# Altium PCB BtPS-250.PcbDoc (part 1 of 2)
Units mm, origin at the board's own origin, x right, y up, seen from the top; angles counter-clockwise.
Board outline 165 x 92.4 mm, 2 copper layers (Top Layer, Bottom Layer); 145 components, 82 nets, 422 pads, 41 vias.
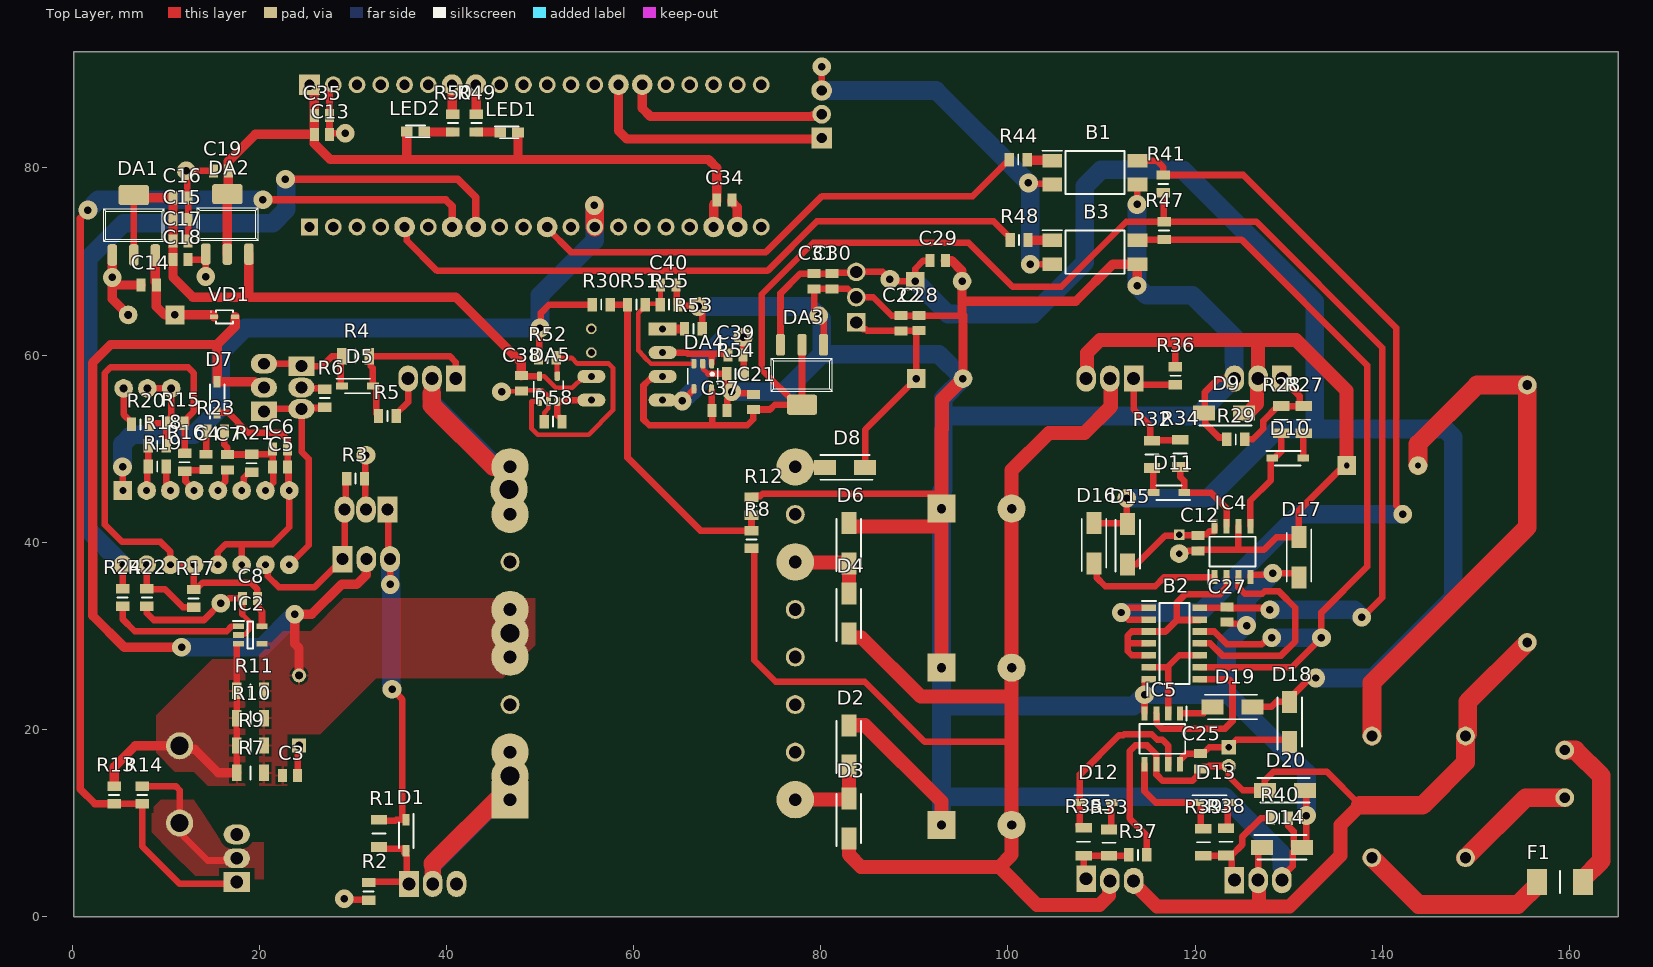
[diagram p0: Top Layer view]
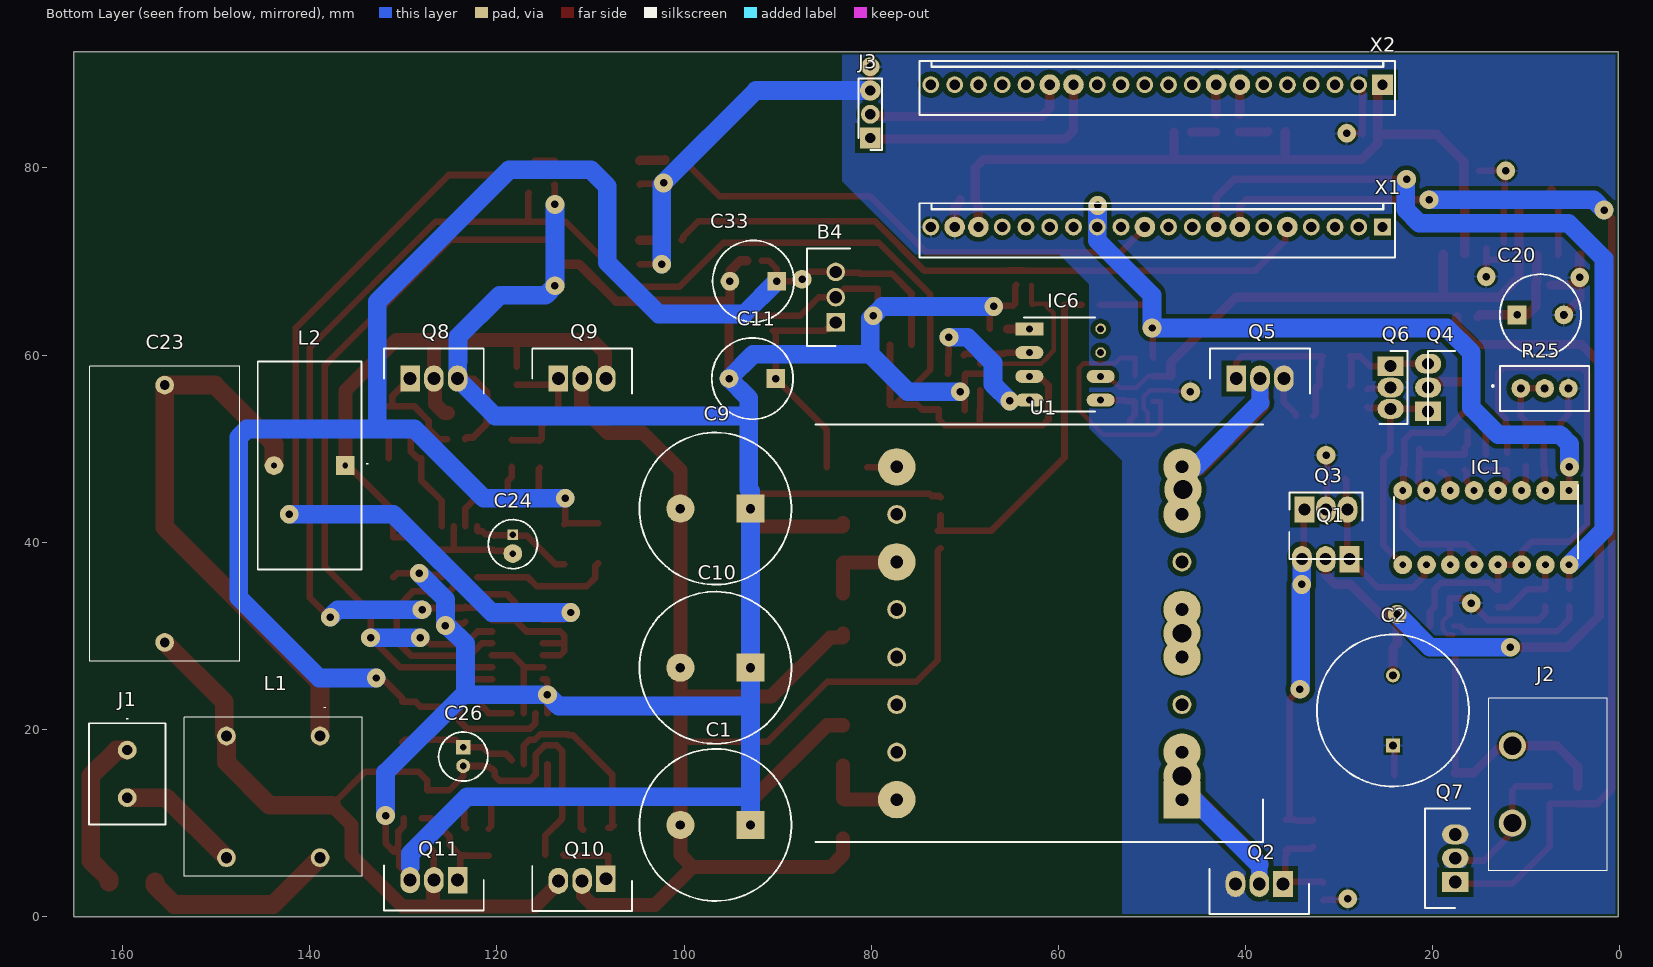
[diagram p1: Bottom Layer view, seen from below]
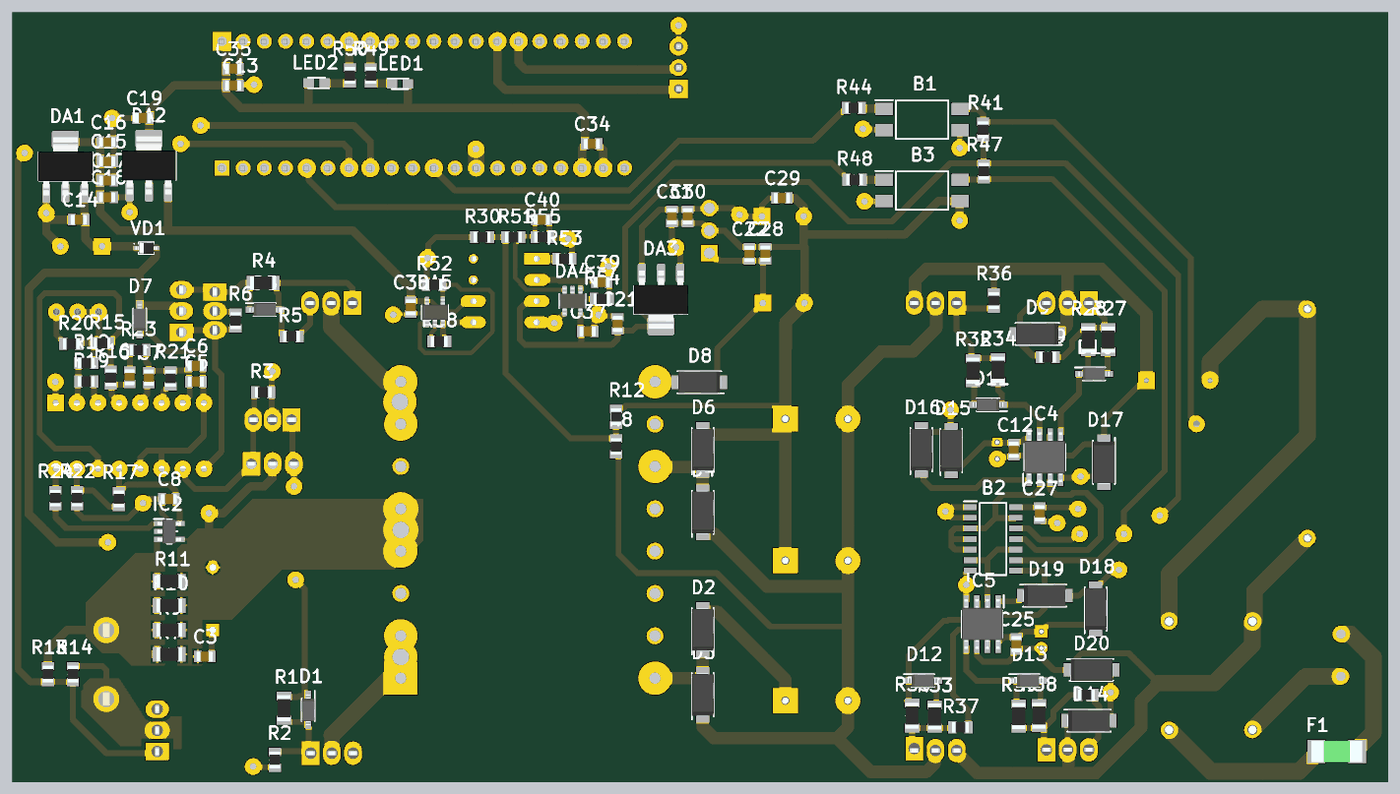
[diagram p2: 3D render of the assembled board from above, using the file's embedded part models]
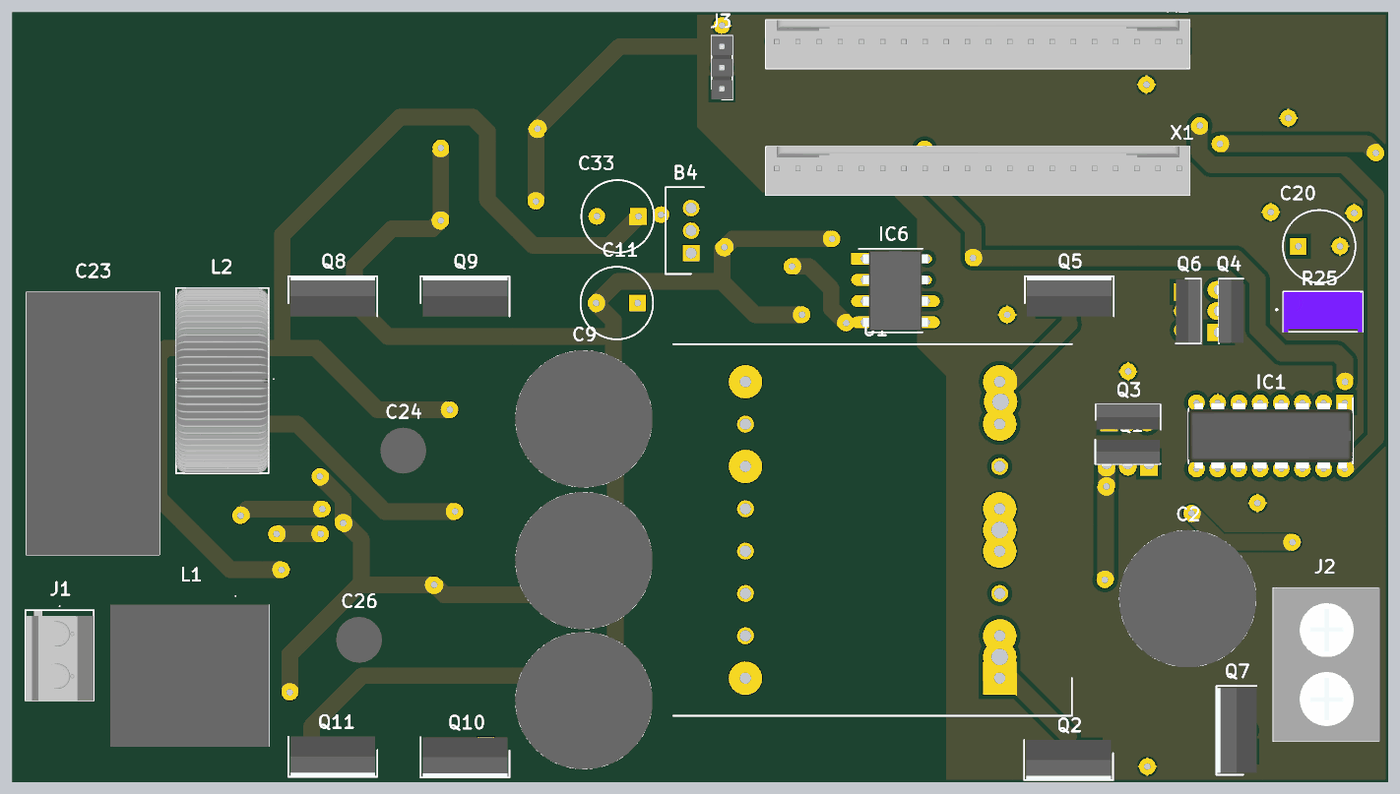
[diagram p3: 3D render of the assembled board from below, using the file's embedded part models]

## Layer stack, top to bottom
Top Solder: solder mask 0.0102, Solder Resist, Dk 3.5
Top Layer: signal copper 0.0356
Dielectric 1: dielectric 0.32, FR-4, Dk 4.8
Bottom Layer: signal copper 0.0356
Bottom Solder: solder mask 0.0102, Solder Resist, Dk 3.5

## Board outline
0.2,0 0.2,92.4 165.2,92.4 165.2,0

## Design rules (kind name [scope] priority, off if disabled: settings)
BoardOutlineClearance [All] p1: gap=0.3 ignorepadtopadclearanceinfootprint=FALSE except(0: Text-OutlineEdge Text-CavityEdge Text-CutoutEdge Text-SplitBarrior Text-SplitContinuation)
Clearance LOW [InNetClass('LOW_Clirance')] p1: gap=0.2 ignorepadtopadclearanceinfootprint=TRUE
Clearance HI_VTG [InNetClass('HI_Voltage')] p2: gap=0.5 ignorepadtopadclearanceinfootprint=TRUE
Clearance [All] p3: gap=0.5 ignorepadtopadclearanceinfootprint=TRUE
Height [All] p1 off: minheight=0 maxheight=25.4 prefheight=12.7
MinimumSolderMaskSliver [All] p1: minsoldermaskwidth=0.15
PolygonConnect [All] p1: connectstyle=Relief reliefconductorwidth=0.254 reliefentries=4 polygonreliefangle="90 Angle" airgapwidth=0.254
RoomDefinition Boost_DC_DC [InComponentClass('Boost_DC_DC')] p1 off: confinementstyle=ConfineIn formatcopy=TRUE lockcomponents=FALSE outline -25.4,-25.4 25.4,-25.4 25.4,0 -25.4,0
RoomDefinition PWM_inverter [InComponentClass('PWM_inverter')] p2 off: confinementstyle=ConfineIn formatcopy=TRUE lockcomponents=FALSE outline -25.4,-25.4 25.4,-25.4 25.4,0 -25.4,0
RoomDefinition Boost_Driver [InComponentClass('Boost_Driver')] p3 off: confinementstyle=ConfineIn formatcopy=TRUE lockcomponents=FALSE outline -25.4,-25.4 25.4,-25.4 25.4,0 -25.4,0
RoomDefinition PWM_Driver [InComponentClass('PWM_Driver')] p4 off: confinementstyle=ConfineIn formatcopy=TRUE lockcomponents=FALSE outline -25.4,-25.4 83.693,-25.4 83.693,38.862 -25.4,38.862
RoomDefinition Power_suply [InComponentClass('Power_suply')] p5 off: confinementstyle=ConfineIn formatcopy=TRUE lockcomponents=FALSE outline -65.913,250.317 18.161,250.317 18.161,311.785 -65.913,311.785
RoomDefinition Mesure [InComponentClass('Mesure')] p6 off: confinementstyle=ConfineIn formatcopy=TRUE lockcomponents=FALSE outline 55.494,281.968 107.564,281.968 107.564,315.623 55.494,315.623
RoomDefinition MCU [InComponentClass('MCU')] p7 off: confinementstyle=ConfineIn formatcopy=TRUE lockcomponents=FALSE outline 98.679,228.661 160.147,228.661 160.147,271.46 98.679,271.46
RoutingVias [All] p1: holewidth=0.8 width=1.6 viastyle="Through Hole" minholewidth=0.6 minwidth=1.5 maxholewidth=1 maxwidth=3
SilkToSilkClearance [All] p1 off: silktosilkclearance=0.254
SilkToSolderMaskClearance [IsPad] p1 off: minsilkscreentomaskgap=0.254 clearancetoexposedcopper=TRUE
SolderMaskExpansion [All] p1: expansion=0.102 istentingtop=FALSE
Width [All] p1: maxlimit=5 minlimit=0.3 preferedwidth=0.5
26 further rules are at their usual default settings.

## Classes and differential pairs
net class HI_Voltage: NetC1_2 NetC23_2 NetF1_1 NetF1_2 NetJ1_2
net class LOW_Clirance: BAT_+ NetC39_1 NetC39_2 NetC40_1 NetDA5_1 NetDA5_3 NetIC2_1 NetIC2_3
component class Boost_DC_DC: C1 C2 C3 C9 C10 C11 D1 D2 D3 D4 D5 D6 D8 J2 Q1 Q2 Q3 Q4 Q5 Q6 Q7 R1 R2 R3 R4 R5 R6 R7 R8 R9 R10 R11 R12 R13 R14 U1
component class MCU: C13 C34 C35 J3 LED1 LED2 R49 R50 X1 X2
component class PWM_Driver: B1 B2 B3 C12 C24 C25 C26 C27 D15 D16 D17 D18 D19 D20 IC4 IC5 R41 R44 R47 R48
component class Mesure: C37 C38 C39 C40 DA4 DA5 IC6 R51 R52 R53 R54 R55 R58
component class PWM_inverter: C23 D9 D10 D11 D12 D13 D14 F1 J1 L1 L2 Q8 Q9 Q10 Q11 R27 R28 R29 R32 R33 R34 R35 R36 R37 R38 R39 R40
component class Power_suply: B4 C14 C15 C16 C17 C18 C19 C20 C21 C22 C28 C29 C30 C31 C33 DA1 DA2 DA3 VD1
component class Boost_Driver: C4 C5 C6 C7 C8 D7 IC1 IC2 R15 R16 R17 R18 R19 R20 R21 R22 R23 R24 R25 R30

## Components (designator, comment, footprint, x,y, rotation, side; value= is the part's Value field where it differs from the comment)
B1 "TLP521-1XSM" SOP254P1016X460-4N 109.3,79.5 r0 top
B2 "74HC00D" SOIC127P600X175-14N 117.8,29.2 r0 top
B3 "TLP521-1XSM" SOP254P1016X460-4N 109.3,71 r0 top
B4 "L7812ACV" TO270P460X1020X2008-3P 83.796,63.49 r90 bottom
C1 "22uF 600V" CAPPRD750W80D1625H2700#1 92.9,9.8 r0 bottom
C2 "470uF 35V" CAPPRD750W80D1625H2700#2 24.257,18.281 r90 bottom
C3 "0,1uF 50V 0805" CAPC2012X90N 23.3,15.1 r180 top
C4 "2.5 uF 50V" CAPC2012X90N 14.3,48.6 r270 top
C5 "10 uF 35V" CAPC2012X90N 22.238,48.073 r0 top
C6 "0,1uF 50V" CAPC2012X90N 22.238,49.978 r0 top
C7 "1n 50V" CAPC2012X90N 16.604,48.554 r270 top
C8 "0,1uF 50V" CAPC2012X90N 19,34 r0 top
C9 "22uF 600V" CAPPRD750W80D1625H2700#1 92.9,43.6 r0 bottom
C10 "22uF 600V" CAPPRD750W80D1625H2700#1 92.9,26.6 r0 bottom
C11 "100uF 50V" CAPPRD500W60D870H1200 90.2,57.5 r0 bottom
C12 "0,1uF 50V 0805" CAPC2012X90N 120.3,39.9 r90 top
C13 "10uF 50V 0805" CAPC2012X90N 26.7,83.6 r0 top
C14 "10uF 50V 0805" CAPC2012X90N 8.2,67.5 r180 top
C15 "10uF 50V 0805" CAPC2012X90N 11.6,74.5 r0 top
C16 "10uF 50V 0805" CAPC2012X90N 11.6,76.8 r0 top
C17 "0,1uF 50V 0805" CAPC2012X90N 11.6,72.2 r0 top
C18 "10uF 50V 0805" CAPC2012X90N 11.6,70.2 r0 top
C19 "10uF 50V 0805" CAPC2012X90N 15.9,79.7 r180 top
C20 "100uF 50V" CAPPRD500W60D870H1200 11,64.3 r180 bottom
C21 "10uF 50V 0805" CAPC2012X90N 72.8,55 r90 top
C22 "10uF 50V 0805" CAPC2012X90N 88.6,63.4 r90 top
C23 "B32674D6335K" B32674D6335K 155.5,29.3 r90 bottom
C24 "UVR1V220MDD1FA" CAPPRD200W50D525H1250#1 118.3,40.8 r270 bottom
C25 "0,1uF 50V 0805" CAPC2012X90N 120.6,16.6 r90 top
C26 "UVR1V220MDD1FA" CAPPRD200W50D525H1250#2 123.6,18.1 r270 bottom
C27 "0,1uF 50V 0805" CAPC2012X90N 123.4,32.3 r270 top
C28 "1uF 50V 0805" CAPC2012X90N 90.504,63.42 r90 top
C29 "10uF 50V 0805" CAPC2012X90N 92.5,70.1 r0 top
C30 "0,1uF 50V 0805" CAPC2012X90N 81.2,67.9 r270 top
C31 "1uF 50V 0805" CAPC2012X90N 79.3,67.9 r270 top
C33 "100uF 50V" CAPPRD500W60D870H1200 90.1,67.9 r0 bottom
C34 "0,1uF 50V 0805" CAPC2012X90N 69.7,76.6 r0 top
C35 "0,1uF 50V 0805" CAPC2012X90N 26.7,85.6 r0 top
C37 "0,1uF 50V 0805" CAPC2012X90N 69.2,54.1 r0 top
C38 "0,1uF 50V 0805" CAPC2012X90N 48,57 r90 top
C39 "100p 0805" CAPC2012X90N 70.9,60 r0 top
C40 "0,1uF 50V 0805" CAPC2012X90N 63.7,67.5 r0 top
D1 "1N4148W-E3-08" SOD3716X135N#1 35.7,8.7 r270 top
D2 "ES1D" DIOM5226X295N 83,18.3 r90 top
D3 "ES1D" DIOM5226X295N 83,10.5 r90 top
D4 "ES1D" DIOM5226X295N 83,32.4 r90 top
D5 "1N4148W-E3-08" SOD3716X135N#1 30.5,56.7 r0 top
D6 "ES1D" DIOM5226X295N 83,39.9 r90 top
D7 "1N4148W-E3-08" SOD3716X135N#1 15.5,55.5 r90 top
D8 "ES1D" DIOM5226X295N 82.6,48 r180 top
D9 "ES1D" DIOM5226X295N 123.1,53.8 r180 top
D10 "1N4148W-E3-08" SOD3716X135N#1 129.9,49 r0 top
D11 "1N4148W-E3-08" SOD3716X135N#1 117.2,45.3 r180 top
D12 "1N4148W-E3-08" SOD3716X135N#2 109.4,12.2 r0 top
D13 "1N4148W-E3-08" SOD3716X135N#1 122,12.2 r0 top
D14 "ES1D" DIOM5226X295N 129.3,7.4 r0 top
D15 "ES1D" DIOM5226X295N 112.8,39.8 r90 top
D16 "ES1D" DIOM5226X295N 109.2,39.9 r90 top
D17 "ES1D" DIOM5226X295N 131.1,38.4 r270 top
D18 "ES1D" DIOM5226X295N 130.1,20.8 r90 top
D19 "ES1D" DIOM5226X295N 124,22.4 r0 top
D20 "ES1D" DIOM5226X295N 129.6,13.5 r0 top
DA1 "" SOT-223 6.6,73.9 r0 top
DA2 "" SOT-223 16.6,74 r0 top
DA3 "" SOT-223 78,57.9 r180 top
DA4 "TLV9061IDBVR" SOT-23-5 67.39,57.74 r180 top
DA5 "TLV9061IDBVR" SOT-23-5 50.9,56.4 r0 top
F1 "0679H2000-05" FUSC6125X279N 159,3.7 r0 top
IC1 "TL494CN" DIP794W53P254L1930H508Q16N 14.318,41.569 r270 bottom
IC2 "INA180A2IDBVR" SOT95P280X145-5N 19.05,30.099 r0 top
IC4 "IR2102SPBF" SOIC127P600X175-8N#1 124,39 r90 top
IC5 "IR2102SPBF" SOIC127P600X175-8N#2 116.5,19 r270 top
IC6 "LOC110" DIP762W53P254L965H335Q8N 59.3,59 r180 bottom
J1 "0398800302" 0398800302 159.5,17.8 r270 bottom
J2 "0387006302" 0387006302 11.5,10 r90 bottom
J3 "961103-6404-AR" HDRV3W64P0X254_1X3_762X250X1050P 80.1,83.2 r90 bottom
L1 "BU10-6003R0BL" BU106003R0BL 138.9,19.3 r270 bottom
L2 "5704-RC" 5704RC 136.2,48.2 r0 bottom
LED1 "LTST-C171KRKT" LEDM2012X90N 46.7,83.8 r0 top
LED2 "LTST-C171KRKT" LEDM2012X90N 36.7,83.9 r180 top
Q1 "BD139" TO254P290X760X1320-3P 28.9,38.2 r0 bottom
Q2 "IRF2804PBF" TO254P482X1016X2192-3P#1 36,3.5 r0 bottom
Q3 "BD140" TO229P300X760X1364-3P 33.7,43.5 r180 bottom
Q4 "BD139" TO254P290X760X1320-3P 20.5,54 r90 bottom
Q5 "IRF2804PBF" TO254P482X1016X2192-3P#1 41,57.5 r180 bottom
Q6 "BD140" TO229P300X760X1364-3P 24.508,58.83 r270 bottom
Q7 "IRF2804PBF" TO254P482X1016X2192-3P#1 17.6,3.7 r90 bottom
Q8 "IRF2804PBF" TO254P482X1016X2192-3P#1 129.28,57.5 r180 bottom
Q9 "IRF2804PBF" TO254P482X1016X2192-3P#1 113.44,57.5 r180 bottom
Q10 "IRF2804PBF" TO254P482X1016X2192-3P#2 108.36,3.823 r0 bottom
Q11 "IRF2804PBF" TO254P482X1016X2192-3P#1 124.2,3.9 r0 bottom
R1 "10-1206" RESC3116X75N#1 32.8,8.9 r270 top
R2 "100k" RESC2013X65N#1 31.7,2.7 r90 top
R3 "4,7k" RESC2013X65N#1 30.3,46.8 r180 top
R4 "10-1206" RESC3116X75N#1 30.3,59.9 r0 top
R5 "100k" RESC2013X65N#1 33.7,53.5 r180 top
R6 "4,7k" RESC2013X65N#1 27,55.4 r270 top
R7 "0.002" RESC3116X75N#1 19.05,15.367 r0 top
R8 "36k" RESC2013X65N#1 72.6,40.3 r270 top
R9 "0.002" RESC3116X75N#1 19.05,18.288 r0 top
R10 "0.002" RESC3116X75N#1 19.05,21.209 r0 top
R11 "0.002" RESC3116X75N#1 19.05,24.13 r0 top
R12 "1k" RESC2013X65N#1 72.6,43.85 r270 top
R13 "18k" RESC2013X65N#1 4.5,13 r90 top
R14 "2k" RESC2013X65N#1 7.5,13 r270 top
R15 "10k" RESC2013X65N#1 11,52.7 r0 top
R16 "9.1k" RESC2013X65N#1 12.032,48.554 r90 top
R17 "10k" RESC2013X65N#1 13,34 r90 top
R18 "510" RESC2013X65N#1 9.1,50.3 r0 top
R19 "100k" RESC2013X65N#1 9.1,48.1 r0 top
R20 "2,2k" RESC2013X65N#1 7.3,52.6 r0 top
R21 "12k" RESC2013X65N#1 19.19,48.454 r270 top
R22 "2.2k" RESC2013X65N#1 8,34.1 r90 top
R23 "1k" RESC2013X65N#1 15.334,51.856 r180 top
R24 "12k" RESC2013X65N#1 5.4,34.1 r270 top
R25 "3296W-1-101LF" 3296W-1 8.05,56.442 r180 bottom
R27 "4.7-1206" RESC3116X75N#1 131.6,53.1 r90 top
R28 "20-1206" RESC3116X75N#1 129.2,53.1 r90 top
R29 "100k" RESC2013X65N#1 124.351,51.001 r0 top
R30 "100k" RESC2013X65N#1 56.553,65.4 r180 top
R32 "4.7-1206" RESC3116X75N#1 115.4,49.4 r90 top
R33 "4.7-1206" RESC3116X75N#2 110.8,7.9 r270 top
R34 "20-1206" RESC3116X75N#1 118.4,49.5 r90 top
R35 "20-1206" RESC3116X75N#3 108.1,8 r270 top
R36 "100k" RESC2013X65N#1 117.9,57.8 r270 top
R37 "100k" RESC2013X65N#2 113.9,6.6 r180 top
R38 "4.7-1206" RESC3116X75N#1 123.3,8 r270 top
R39 "20-1206" RESC3116X75N#1 120.875,7.95 r270 top
R40 "100k" RESC2013X65N#1 129,10.5 r180 top
R41 "1k" RESC2013X65N#1 116.6,78.3 r90 top
R44 "330" RESC2013X65N#1 101.1,80.9 r0 top
R47 "1k" RESC2013X65N#1 116.7,73.3 r270 top
R48 "330" RESC2013X65N#1 101.2,72.3 r0 top
R49 "1k" RESC2013X65N#1 43.2,84.8 r90 top
R50 "1k" RESC2013X65N#1 40.7,84.8 r90 top
R51 "0" RESC2013X65N#1 60.3,65.4 r0 top
R52 "10k" RESC2013X65N#1 50.8,59.7 r180 top
R53 "200" RESC2013X65N#1 66.4,62.8 r180 top
R54 "10k" RESC2013X65N#1 70.9,58 r0 top
R55 "200k" RESC2013X65N#1 63.8,65.4 r180 top
R58 "10k" RESC2013X65N#1 51.4,52.9 r0 top
U1 "CPH-ETD39-1S-16P-C" DIPS3048W80P508L4460H3610Q16N 46.8,12.5 r0 bottom locked
VD1 "BAS316" SOD-323_MED 16.3,64.1 r0 top
X1 "WH-20S" WF-20S#1 49.5,73.695 r0 bottom locked
X2 "WH-20S" WF-20S#2 49.5,88.9 r0 bottom locked

## Footprints (in the part's own frame and the unit in brackets; to place one, negate y for a bottom-side part, rotate by r counter-clockwise, add the part's x,y. Pads: shape width x height; smd on the part's side, far side on the other; paste and mask are expansions set on the pad)
3296W-1 [mm]
  round 2 hole 0.8: 1(-2.54,0) 2(0,0) 3(2.54,0)
  silkscreen extent -5.64,-2.41 4.76,2.41, body extent -4.78,-2.48 4.78,2.35, height 11.55
5704RC [mm]
  rect 2x2 hole 0.606: 1(0,0)
  round 2 hole 0.606: 2(7.62,0)
  silkscreen extent -2.4,-11.11 9.36,11.11, body extent -1.74,-11.11 9.36,11.11, height 22.01
0387006302 [mm]
  round 2.895 hole 1.93: 1(0,0) 2(8.26,0)
  silkscreen extent -5.07,-10.16 13.33,2.54, body extent -5.1,-10.25 13.36,2.45, height 12.7
0398800302 [mm]
  round 2 hole 1.1: 1(0,0) 2(5.08,0)
  silkscreen extent -3.4,-4.1 7.95,4.1, body extent -2.78,-4.08 7.99,4.05, height 10.1
B32674D6335K [mm]
  round 2 hole 1.05: 1(0,0) 2(27.5,0)
  silkscreen extent -2,-8 29.5,8, body extent -2,-8 29.5,8, height 32.1
BU106003R0BL [mm]
  round 2 hole 1.2: 1(0,0) 2(0,-10) 3(13,-10) 4(13,0)
  silkscreen extent -3.1,-14.5 15,4.5, body extent -2,-14.5 15,4.5, height 22.6
CAPC2012X90N [mm]
  rect 0.96x1.39 smd: 1(-0.81,0) 2(0.81,0)
  body extent -1,-0.63 1,0.63, height 0.9
CAPPRD200W50D525H1250#1 [mm]
  rect 1.1x1.1 hole 0.7: 1(0,0)
  round 2 hole 0.7: 2(2,0)
  silkscreen extent -1.62,-2.63 3.62,2.62, body extent -1.75,-2.75 3.75,2.75, height 12.5
CAPPRD200W50D525H1250#2 [mm]
  rect 1.5x1.5 hole 0.7: 1(0,0)
  round 1.5 hole 0.7: 2(2,0)
  silkscreen extent -1.62,-2.63 3.62,2.62, body extent -1.74,-2.75 3.75,2.75, height 12.5
CAPPRD500W60D870H1200 [mm]
  rect 2x2 / inner round 1.2 / far side rect 2x2 hole 0.8: 1(0,0)
  round 2 hole 0.8: 2(5,0)
  silkscreen extent -1.85,-4.35 6.85,4.35
CAPPRD750W80D1625H2700#1 [mm]
  rect 3x3 hole 1: 1(0,0)
  round 3 hole 1: 2(7.5,0)
  silkscreen extent -4.37,-8.12 11.88,8.12, body extent -4.5,-8.25 12,8.25, height 27
CAPPRD750W80D1625H2700#2 [mm]
  rect 1.5x1.5 hole 0.8: 1(0,0)
  round 1.5 hole 0.8: 2(7.5,0)
  silkscreen extent -4.37,-8.12 11.87,8.13, body extent -4.5,-8.25 12,8.25, height 27
DIOM5226X295N [mm]
  rect 2.35x1.6 smd: 1(-2.15,0) 2(2.15,0)
  silkscreen extent -2.95,-1.31 2.62,1.31, body extent -2.62,-1.31 2.62,1.31, height 2.95
DIP762W53P254L965H335Q8N [mm]
  rect 3x1.4 hole 0.733: 1(-3.81,3.81)
  oval 3x1.4 hole 0.733: 2(-3.81,1.27) 3(-3.81,-1.27) 4(-3.81,-3.81) 5(3.81,-3.81) 6(3.81,-1.27)
  round 1.133 hole 0.733: 7(3.81,1.27) 8(3.81,3.81)
  silkscreen extent -4.38,-5.02 3.24,5.02, body extent -3.94,-4.83 3.94,4.83, height 3.35
DIP794W53P254L1930H508Q16N [mm]
  rect 2x2 hole 0.73: 1(-3.97,8.89)
  round 2 hole 0.73: 2(-3.97,6.35) 3(-3.97,3.81) 4(-3.97,1.27) 5(-3.97,-1.27) 6(-3.97,-3.81) 7(-3.97,-6.35) 8(-3.97,-8.89) 9(3.97,-8.89) 10(3.97,-6.35) 11(3.97,-3.81) 12(3.97,-1.27) 13(3.97,1.27) 14(3.97,3.81) 15(3.97,6.35) 16(3.97,8.89)
  silkscreen extent -4.53,-9.84 3.3,9.84, body extent -3.94,-9.84 3.94,9.84, height 5.27
DIPS3048W80P508L4460H3610Q16N [mm]
  rect 4x4 hole 1.35: 1(0,0)
  round 4 hole 1.35: 2(0,-5.08) 4(0,-15.24) 5(0,-20.32) 7(0,-30.48) 8(0,-35.56) 9(30.48,-35.56) 11(30.48,-25.4) 16(30.48,0)
  round 2.025 hole 1.35: 3(0,-10.16) 6(0,-25.4) 10(30.48,-30.48) 12(30.48,-20.32) 13(30.48,-15.24) 14(30.48,-10.16) 15(30.48,-5.08)
  silkscreen extent -8.66,-40.08 39.14,4.52
FUSC6125X279N [mm]
  rect 2.15x2.8 smd: 1(-2.455,0) 2(2.455,0)
  silkscreen extent 0,-1.17 0,1.17, body extent -3.05,-1.27 3.05,1.27, height 2.79
HDRV3W64P0X254_1X3_762X250X1050P [mm]
  rect 2.2x2.2 hole 1.1: 1(0,0)
  round 2 hole 1.1: 2(2.54,0)
  round 2.2 hole 1.1: 3(5.08,0)
  silkscreen extent -1.27,-1.25 6.35,1.25, body extent -1.27,-1.25 6.35,1.25, height 10.5
LEDM2012X90N [mm]
  rect 1.25x1.1 smd: 1(-0.95,0) 2(0.95,0)
  silkscreen extent -1.5,-0.63 1,0.63
RESC2013X65N#1 [mm]
  rect 1x1.45 smd: 1(-0.95,0) 2(0.95,0)
  silkscreen extent 0,-0.54 0,0.54, body extent -1,-0.64 1,0.64, height 0.65
RESC2013X65N#2 [mm]
  rect 1x1.45 smd: 1(-0.95,0) 2(1,0)
  silkscreen extent 0,-0.54 0,0.54, body extent -1,-0.64 1,0.64, height 0.65
RESC3116X75N#1 [mm]
  rect 1.05x1.75 smd: 1(-1.45,0) 2(1.45,0)
  silkscreen extent 0,-0.7 0,0.7, body extent -1.55,-0.8 1.55,0.8, height 0.75
RESC3116X75N#2 [mm]
  rect 1.05x1.75 smd: 1(-1.4,0) 2(1.4,0)
  silkscreen extent 0,-0.7 0,0.7, body extent -1.55,-0.8 1.55,0.8, height 0.75
RESC3116X75N#3 [mm]
  rect 1.05x1.75 smd: 1(-1.5,0) 2(1.5,0)
  silkscreen extent 0,-0.7 0,0.7, body extent -1.55,-0.8 1.55,0.8, height 0.75
SOD3716X135N#1 [mm]
  rect 1.25x0.75 smd: 1(-1.65,0) 2(1.65,0)
  silkscreen extent -2.27,-0.77 1.35,0.77, body extent -1.85,-0.77 1.85,0.77, height 1.35
SOD3716X135N#2 [mm]
  rect 1.25x0.75 smd: 1(-1.7,0) 2(1.7,0)
  silkscreen extent -2.27,-0.77 1.35,0.77, body extent -1.85,-0.77 1.85,0.77, height 1.35
SOD-323_MED [mm] "SOD-323, 2-Leads, Body 1,25x2,50mm, IPC Medium Density"
  rrect15% 0.85x0.45 smd paste+0 mask+0.05: AN(1.125,0) CA(-1.125,0)
  silkscreen extent -1.5,-0.7 0.9,0.7, body extent -1.3,-0.67 1.3,0.68, height 1.1
SOIC127P600X175-8N#1 [mm]
  rect 1.525x0.65 smd: 1(-2.712,1.905) 2(-2.712,0.635) 3(-2.712,-0.635) 4(-2.712,-1.905) 5(2.712,-1.905) 6(2.712,-0.635) 7(2.712,0.635) 8(2.712,1.905)
  silkscreen extent -3.47,-2.45 1.6,2.58, body extent -3,-2.45 3,2.45, height 1.75
SOIC127P600X175-8N#2 [mm]
  rect 1.525x0.65 smd: 1(-2.712,1.905) 2(-2.712,0.635) 3(-2.712,-0.635) 4(-2.712,-1.905) 5(2.712,-1.905) 6(2.712,-0.635) 7(2.706,0.632) 8(2.712,1.905)
  silkscreen extent -3.47,-2.45 1.6,2.58, body extent -3,-2.45 3,2.45, height 1.75
SOIC127P600X175-14N [mm]
  rect 1.55x0.7 smd: 1(-2.725,3.81) 2(-2.725,2.54) 3(-2.725,1.27) 4(-2.725,0) 5(-2.725,-1.27) 6(-2.725,-2.54) 7(-2.725,-3.81) 8(2.725,-3.81) 9(2.725,-2.54) 10(2.725,-1.27) 11(2.725,0) 12(2.725,1.27) 13(2.725,2.54) 14(2.725,3.81)
  silkscreen extent -3.5,-4.33 1.6,4.51
SOP254P1016X460-4N [mm]
  rect 2.1x1.45 smd: 1(-4.55,1.27) 2(-4.55,-1.27) 3(4.55,-1.27) 4(4.55,1.27)
  silkscreen extent -5.6,-2.3 3.15,2.34
SOT95P280X145-5N [mm]
  rect 1.2x0.6 smd mask+0.05: 1(-1.25,0.95) 2(-1.25,0) 3(-1.25,-0.95) 4(1.25,-0.95) 5(1.25,0.95)
  silkscreen extent -1.85,-1.45 0.3,1.5, body extent -1.4,-1.45 1.4,1.45, height 1.2
SOT-23-5 [mm] "SOT23, 5-Leads, Body 2,80x1,60mm, Pitch 0,95mm, IPC Medium Density"
  rrect50% 0.55x1 smd mask+0.05: 1(-0.95,-1.35) 2(0,-1.35) 3(0.95,-1.35) 4(0.95,1.35) 5(-0.95,1.35)
  silkscreen extent -1.59,-0.88 1.59,0.85, body extent -1.55,-1.6 1.55,1.6, height 1.45
SOT-223 [mm]
  rrect50% 1x2.3 smd mask+0.05: 1(-2.3,-3.2) 2(0,-3.2) 3(2.3,-3.2)
  rrect25% 3.25x2.15 smd mask+0.05: 4(0,3.2)
  silkscreen extent -3.22,-1.75 3.28,1.75, body extent -3.25,-3.48 3.25,3.48, height 1.68
TO229P300X760X1364-3P [mm]
  rect 2.1x2.8 hole 1.3 mask+0.05: 1(0,0)
  oval 2.1x2.8 hole 1.3 mask+0.05: 2(2.29,0) 3(4.58,0)
  silkscreen extent -1.61,-1.17 6.19,1.83, body extent -1.51,-1.17 6.09,1.83, height 12.76
TO254P290X760X1320-3P [mm]
  rect 2.1x2.8 hole 1.28: 1(0,0)
  oval 2.1x2.8 hole 1.28: 2(2.54,0) 3(5.08,0)
  silkscreen extent -1.36,-2.9 6.44,0, body extent -1.26,-2.9 6.34,0.25, height 12.92
TO254P482X1016X2192-3P#1 [mm]
  rect 2.1x2.8 hole 1.38: 1(0,0)
  oval 2.1x2.8 hole 1.38: 2(2.54,0) 3(5.08,0)
  silkscreen extent -2.79,-1.6 7.87,3.22, body extent -2.54,-1.59 7.62,3.22, height 21.25
TO254P482X1016X2192-3P#2 [mm]
  rect 2.1x2.8 hole 1.38: 1(0,-0.223)
  oval 2.1x2.8 hole 1.38: 2(2.54,0) 3(5.08,0)
  silkscreen extent -2.79,-1.6 7.87,3.22, body extent -2.54,-1.6 7.62,3.23, height 21.25
TO270P460X1020X2008-3P [mm]
  rect 1.98x1.98 / inner round 1.98 / far side rect 1.98x1.98 hole 1.32: 1(0,0)
  round 1.98 hole 1.32: 2(2.7,0) 3(5.4,0)
  silkscreen extent -2.5,-1.53 7.9,3.07
WF-20S#1 [mm] "Connector; Header; 20 Position"
  rect 1.8x1.8 hole 1.1: 1(-24.13,0)
  round 1.8 hole 1.1: 2(-21.59,0) 3(-19.05,0) 4(-16.51,0) 6(-11.43,0) 9(-3.81,0) 10(-1.27,0) 12(3.81,0) 13(6.35,0) 14(8.89,0) 15(11.43,0) 16(13.97,0) 17(16.51,0) 20(24.13,0)
  round 2.2 hole 1.1: 5(-13.97,0) 7(-8.89,0) 8(-6.35,0) 11(1.27,0) 18(19.05,0) 19(21.59,0)
  silkscreen extent -25.47,-2.54 25.33,3.25, body extent -25.5,-2.55 25.3,3.25, height 11.63
WF-20S#2 [mm] "Connector; Header; 20 Position"
  rect 2.2x2.2 hole 1.1: 1(-24.13,0)
  round 1.8 hole 1.1: 2(-21.59,0) 3(-19.05,0) 4(-16.51,0) 5(-13.97,0) 6(-11.43,0) 9(-3.81,0) 10(-1.27,0) 11(1.27,0) 12(3.81,0) 13(6.35,0) 16(13.97,0) 17(16.51,0) 18(19.05,0) 19(21.59,0) 20(24.13,0)
  round 2.2 hole 1.1: 7(-8.89,0) 8(-6.35,0) 14(8.89,0) 15(11.43,0)
  silkscreen extent -25.47,-2.54 25.33,3.25, body extent -25.5,-2.55 25.3,3.25, height 11.63

## Part data
B1 B3: "Optocoupler; SMD; Channels:1; Out: transistor; Uinsul:5.3kV", Manufacturer_Name=Isocom, Datasheet Link=https://datasheet.lcsc.com/szlcsc/Isocom-Components-TLP521-1XSM_C83157.pdf, Geometry.Height=4.6mm, Manufacturer_Part_Number=TLP521-1XSM
B2: "NEXPERIA - 74HC00D - NAND Gate, 74HC00, 2 Input, 5.2 mA, 2 V to 6 V, SOIC-14", Manufacturer_Name=Nexperia, Mouser Part Number=771-74HC00D, Datasheet Link=https://altium.componentsearchengine.com/Datasheets/2/74HC00D.pdf, Geometry.Height=1.75mm, Manufacturer_Part_Number=74HC00D, Mouser Price/Stock=https://www.mouser.co.uk/ProductDetail/Nexperia/74HC00D?qs=Q7xBXtx7xQgKEyQZmXe6mg%3D%3D
B4: "TO220 voltage regulator,L7812ACV 12V 1A STMicroelectronics L7812ACV, Single Linear Voltage Regulator, 1A 12 V, 2%, 3-Pin TO-220", Manufacturer_Name=STMicroelectronics, Mouser Part Number=511-L7812ACV, Arrow Part Number=L7812ACV, Arrow Price/Stock=https://www.arrow.com/en/products/l7812acv/stmicroelectronics?region=europe, Datasheet Link=http://www.st.com/web/en/resource/technical/document/datasheet/CD00000444.pdf, Geometry.Height=4.6mm, Manufacturer_Part_Number=L7812ACV, Mouser Price/Stock=https://www.mouser.co.uk/ProductDetail/STMicroelectronics/L7812ACV?qs=bZskSr8d5Y9fWhq%2FyUrU3A%3D%3D
C1 C2 C9 C10: library part UPW1H102MHD, "Capacitor", Height=27mm
C3 C4 C5 C6 C7 C8 C12 C13 C14 C15 C16 C17 C18 C19 C21 C22 C25 C27 C28 C29 C30 C31 C34 C35 C37 C38 C39 C40: library part MCMT21N470F250CT, "Capacitor", Height=0.9mm
C11 C20 C33: library part MAL203690109E3, "Aluminum Electrolytic Capacitors - Radial Leaded 100uF 50V 20% Radial", Manufacturer_Name=Vishay, Mouser Part Number=594-2222-036-90109, Arrow Part Number=MAL203690109E3, Arrow Price/Stock=https://www.arrow.com/en/products/mal203690109e3/vishay, Datasheet Link=https://www.vishay.com/docs/28312/036rsp.pdf, Geometry.Height=12mm, Manufacturer_Part_Number=MAL203690109E3, Mouser Price/Stock=https://www.mouser.co.uk/ProductDetail/Vishay-BC-Components/MAL203690109E3?qs=4T%252B5yYZyZYdFWMOgqUZuiA%3D%3D
C23: "Capacitor", Manufacturer_Name=TDK, Mouser Part Number=871-B32674D6335K, Arrow Part Number=B32674D6335K, Arrow Price/Stock=https://www.arrow.com/en/products/b32674d6335k/epcos-tdk, Datasheet Link=https://en.tdk.eu/inf/20/20/db/fc_2009/MKP_B32674_678.pdf, Height=32mm, Manufacturer_Part_Number=B32674D6335K, Mouser Price/Stock=https://www.mouser.co.uk/ProductDetail/EPCOS-TDK/B32674D6335K?qs=IQR8xM2KsGjr5uKRT4Ngjw%3D%3D
C24 C26: "Capacitor Polarised", Manufacturer_Name=Nichicon, Mouser Part Number=647-UVR1V220MDD1FA, Datasheet Link=https://componentsearchengine.com/Datasheets/1/UVR1V220MDD1FA.pdf, Height=12.5mm, Manufacturer_Part_Number=UVR1V220MDD1FA, Mouser Price/Stock=https://www.mouser.co.uk/ProductDetail/Nichicon/UVR1V220MDD1FA/?qs=aEaV1LakhLZp9mEQuSYOqQ%3D%3D
D1 D5 D7 D10 D11 D12 D13: "Diode", Manufacturer_Name=Vishay, Mouser Part Number=78-1N4148W-E3-08, Arrow Part Number=1N4148W-E3-08, Arrow Price/Stock=https://www.arrow.com/en/products/1n4148w-e3-08/vishay?region=nac, Datasheet Link=http://www.vishay.com/docs/85748/1n4148w.pdf, Height=1.35mm, Manufacturer_Part_Number=1N4148W-E3-08, Mouser Price/Stock=https://www.mouser.co.uk/ProductDetail/Vishay-Semiconductors/1N4148W-E3-08?qs=bTzheeSci6TVjpxfjjRVMw%3D%3D
D2 D3 D4 D6 D8 D9 D14 D15 D16 D17 D18 D19 D20: "Diode", Manufacturer_Name=SMC, Datasheet Link=https://4donline.ihs.com/images/VipMasterIC/IC/SMCD/SMCD-S-A0005425901/SMCD-S-A0005425901-1.pdf?hkey=833C7E3902CC3CD9C0453977398360A8, Height=2.95mm, Manufacturer_Part_Number=ES1D
DA1 DA3: library part LM1117MP-3.3, "Linear Voltage Regulator IC 1 Output 800mA SOT-223", Package=SOT-223, Part Number=LM1117S-5.0, Component Type=SMD, ComponentLink1Description=Datasheet, ComponentLink1URL=https://www.ti.com/lit/ds/symlink/lm1117.pdf
DA2: library part LM1117MP-3.3, "Linear Voltage Regulator IC 1 Output 800mA SOT-223", Manufacturer="Texas Instruments", Package=SOT-223, Supplier Part Number 1=LM1117MP-3.3/NOPBTR-ND, Temperature range="0°C ~ 125°C", Ajax_1C_ID=9463, Ajax_1C_PN="LM1117MP-3.3 Molded SOT-223, 6.50 x 3.56 x 1.6mm Body, 4 Lead, 2.3mm Pitch MP04A_N	1SPX", Component Status="On Review", Component Type=SMD, ComponentLink1Description=Datasheet, ComponentLink1URL=https://www.ti.com/lit/ds/symlink/lm1117.pdf, GUID_1C=e0b887c0-e6df-11e6-82a6-d8cb8a9acc66, Lifecycle="RND Only", Part Number=LM1117MP-3.3, Part Type="Power / Linear Regulator", Replacement=NONE, Standard Lead Time="6 Weeks", Supplier 1=Digi-Key
DA4 DA5: "10MHz, 0.5pA Bias, Rail-to-Rail Input/Output, 1.8V CMOS Operational Amplifiers, 1 Channels, SOT-23-5", Manufacturer="Texas Instruments", Package=SOT-23-5, Supplier Part Number 1=296-52284-2-ND, Temperature range="-40°C ~ 125°C", Ajax_1C_ID=24284, Ajax_1C_PN="TLV9061IDBVR TI 1.8V-5.5V Operational Amplifier IC SOT23-5", Ajax_1С_Status="Mass Production", Component Type=SMD, ComponentLink1Description=Datasheet, ComponentLink1URL=https://www.ti.com/lit/ds/symlink/tlv9061.pdf, Part Number=TLV9061IDBVR, Part Type="Amplifier / OpAmp", Price=0,72409091, Replacement=NONE, Standard Lead Time="16 Weeks", Supplier 1=Digi-Key
F1: "Fuse", Manufacturer_Name="Bel Circuit Protection", Arrow Part Number=0679H2000-05, Arrow Price/Stock=https://www.arrow.com/en/products/0679h2000-05/bel-group?region=nac, Datasheet Link=https://www.arrow.com/en/products/0679h2000-05/bel-group, Height=2.79mm, Manufacturer_Part_Number=0679H2000-05
IC1: "Integrated Circuit", Manufacturer_Name="Texas Instruments", Mouser Part Number=595-TL494CN, Arrow Part Number=TL494CN, Arrow Price/Stock=https://www.arrow.com/en/products/tl494cn/texas-instruments?region=nac, Datasheet Link=http://www.ti.com/lit/gpn/tl494, Height=5.08mm, Manufacturer_Part_Number=TL494CN, Mouser Price/Stock=https://www.mouser.co.uk/ProductDetail/Texas-Instruments/TL494CN?qs=N6WZOzgtpqWAYQVxthNGyw%3D%3D
IC2: "Integrated Circuit", Manufacturer_Name="Texas Instruments", Mouser Part Number=595-INA180A2IDBVR, Arrow Part Number=INA180A2IDBVR, Arrow Price/Stock=https://www.arrow.com/en/products/ina180a2idbvr/texas-instruments?region=nac, Datasheet Link=http://www.ti.com/lit/ds/symlink/ina180.pdf, Height=1.45mm, Manufacturer_Part_Number=INA180A2IDBVR, Mouser Price/Stock=https://www.mouser.co.uk/ProductDetail/Texas-Instruments/INA180A2IDBVR?qs=5aG0NVq1C4wYcJfa99BoHg%3D%3D
IC4 IC5: "Integrated Circuit", Manufacturer_Name=Infineon, Mouser Part Number=942-IR2102SPBF, Arrow Part Number=IR2102SPBF, Arrow Price/Stock=https://www.arrow.com/en/products/ir2102spbf/infineon-technologies-ag?region=nac, Datasheet Link=https://www.infineon.com/cms/en/product/power/gate-driver-ics/?, Height=1.75mm, Manufacturer_Part_Number=IR2102SPBF, Mouser Price/Stock=https://www.mouser.co.uk/ProductDetail/Infineon-IR/IR2102SPBF?qs=dQmlx5f5cRJqfCRMLAcrGg%3D%3D
IC6: "Integrated Circuit", Manufacturer_Name=LITTELFUSE, Mouser Part Number=849-LOC110, Arrow Part Number=LOC110, Arrow Price/Stock=https://www.arrow.com/en/products/loc110/ixys, Datasheet Link=http://www.ixysic.com/home/pdfs.nsf/0/2E7C7ED81A9497A385256A2C0068BE89/$file/LOC110.pdf, Height=3.353mm, Manufacturer_Part_Number=LOC110, Mouser Price/Stock=https://www.mouser.co.uk/ProductDetail/IXYS-Integrated-Circuits/LOC110?qs=lQlU%252BwB40guWe%2FeQ%2FzktPA%3D%3D
J1 J2: "Connector", Manufacturer_Name=Molex, Mouser Part Number=N/A
  J1: Arrow Part Number=0398800302, Arrow Price/Stock=https://www.arrow.com/en/products/0398800302/molex?region=nac, Datasheet Link=https://www.molex.com/pdm_docs/sd/398800302_sd.pdf, Height=10.3mm, Manufacturer_Part_Number=0398800302, Mouser Price/Stock=https://www.mouser.co.uk/ProductDetail/Molex/0398800302?qs=PBcRNPEHKsqSgs7Dx0mONg%3D%3D
  J2: Arrow Part Number=0387006302, Arrow Price/Stock=https://www.arrow.com/en/products/0387006302/molex, Datasheet Link=https://datasheet.datasheetarchive.com/originals/distributors/Datasheets-DGA23/1543392.pdf, Height=13mm, Manufacturer_Part_Number=0387006302, Mouser Price/Stock=https://www.mouser.co.uk/ProductDetail/Molex/0387006302/?qs=PBcRNPEHKsoO9p6NPCT14g%3D%3D
J3: "Connector", Manufacturer_Name=3M, Mouser Part Number=517-9611036404AR, Datasheet Link=https://datasheet.datasheetarchive.com/originals/distributors/Datasheets-DGA21/2082015.pdf, Height=10.5mm, Manufacturer_Part_Number=961103-6404-AR, Mouser Price/Stock=https://www.mouser.co.uk/ProductDetail/3M-Electronic-Solutions-Division/961103-6404-AR?qs=A%252BtsDZJT%252Bi8c%252BGQWaXFlLA%3D%3D
L1: "Inductor", Manufacturer_Name=COILCRAFT, Mouser Part Number=994-BU10-6003R0BL, Datasheet Link=https://componentsearchengine.com/Datasheets/1/BU10-6003R0BL.pdf, Height=22.5mm, Manufacturer_Part_Number=BU10-6003R0BL, Mouser Price/Stock=https://www.mouser.co.uk/ProductDetail/Coilcraft/BU10-6003R0BL?qs=ZYnrCdKdyec0p%252B8vTszPQw%3D%3D
L2: "Inductor High Current Toroid 275uH/150uH 15% 1KHz 2A 0.24Ohm DCR RDL", Manufacturer_Name=Bourns, Mouser Part Number=542-5704-RC, Datasheet Link=https://www.bourns.com/docs/Product-Datasheets/5700_series.pdf, Geometry.Height=22.225mm, Manufacturer_Part_Number=5704-RC, Mouser Price/Stock=https://www.mouser.co.uk/ProductDetail/JW-Miller/5704-RC?qs=bN78%2FnoHSDjVEliEAq9T7g%3D%3D
LED1 LED2: "LED", Manufacturer_Name=Lite-On, Mouser Part Number=859-LTST-C171KRKT, Arrow Part Number=LTST-C171KRKT, Arrow Price/Stock=https://www.arrow.com/en/products/ltst-c171krkt/lite-on-technology?region=nac, Datasheet Link=http://www.mouser.com/datasheet/2/239/Lite-On-LTST-C171KRKT-1175280.pdf, Height=0.9mm, Manufacturer_Part_Number=LTST-C171KRKT, Mouser Price/Stock=https://www.mouser.co.uk/ProductDetail/Lite-On/LTST-C171KRKT?qs=5XMAZBf2SiSTcAb1f5vDzw%3D%3D
Q1 Q4: "Transistor BJT NPN", Manufacturer_Name=STMicroelectronics, Mouser Part Number=511-BD139, Arrow Part Number=BD139, Arrow Price/Stock=https://www.arrow.com/en/products/bd139/stmicroelectronics?region=europe, Datasheet Link=http://www.st.com/web/en/resource/technical/document/datasheet/CD00001225.pdf, Height=2.9mm, Manufacturer_Part_Number=BD139, Mouser Price/Stock=https://www.mouser.co.uk/ProductDetail/STMicroelectronics/BD139?qs=ljbEvF4DwOPW%2FLxHSWYMMA%3D%3D
Q2 Q5 Q7 Q8 Q9 Q10 Q11: "MOSFET (N-Channel)", Manufacturer_Name=Infineon, Mouser Part Number=942-IRF2804PBF, Arrow Part Number=IRF2804PBF, Arrow Price/Stock=https://www.arrow.com/en/products/irf2804pbf/infineon-technologies-ag, Datasheet Link=https://componentsearchengine.com/Datasheets/1/IRF2804PBF.pdf, Height=4.82mm, Manufacturer_Part_Number=IRF2804PBF, Mouser Price/Stock=https://www.mouser.co.uk/ProductDetail/Infineon-IR/IRF2804PBF?qs=2r01AXMCG3OqtrI77lWLsA%3D%3D
Q3 Q6: library part BD138, "Transistor BJT PNP", Manufacturer_Name=onsemi, Mouser Part Number=863-BD138, Datasheet Link=http://www.onsemi.com/pub/Collateral/BD136-D.PDF, Height=3mm, Manufacturer_Part_Number=BD138, Mouser Price/Stock=https://www.mouser.co.uk/ProductDetail/onsemi/BD138?qs=vNc2DXHODiJSpBHA4I4SSg%3D%3D
R1 R4 R7 R9 R10 R11 R27 R28 R32 R33 R34 R35 R38 R39: library part MCMR12X1003FTL, "Resistor", Height=0.75mm
R2 R3 R5 R6 R8 R12 R13 R14 R15 R16 R17 R18 R19 R20 R21 R22 R23 R24 R29 R30 R36 R37 R40 R41 R44 R47 R48 R49 R50 R51 R52 R53 R54 R55 R58: library part ERJP06J822V, "Resistor", Height=0.7mm
R25: "Resistor", Manufacturer_Name=Bourns, Mouser Part Number=652-3296W-1-101LF, Arrow Part Number=3296W-1-101LF, Arrow Price/Stock=https://www.arrow.com/en/products/3296w-1-101lf/bourns?region=europe, Datasheet Link=https://www.bourns.com/pdfs/3296.pdf, Manufacturer_Part_Number=3296W-1-101LF, Mouser Price/Stock=https://www.mouser.co.uk/ProductDetail/Bourns/3296W-1-101LF?qs=UcU9LKO1dwEefwKxVJG4Jw%3D%3D
U1: "Undefined or Miscellaneous", Manufacturer_Name=FERROXCUBE, Datasheet Link=http://www.farnell.com/datasheets/1935353.pdf, Height=36.1mm, Manufacturer_Part_Number=CPH-ETD39-1S-16P-C
VD1: "Diode Standard 100V 250mA, SOD-323/SC-76", Current=250mA, Manufacturer="Nexperia USA Inc.", Package=SOD-323, Supplier Part Number 1=1727-7370-2-ND, Temperature range="-65°C ~ 150°C", Voltage=100V, Ajax_1C_ID=3460, Ajax_1C_PN="BAS316,115 100V 0.25A(DC) Nexperia diode SOD-323", Ajax_1С_Status="Mass Production", Component Type=SMD, ComponentLink1Description=Datasheet, ComponentLink1URL=https://assets.nexperia.com/documents/data-sheet/BAS16_SER.pdf, Marking=A6, Part Number=BAS316, Part Type=General, Price=0,00753566, Replacement="BAS316,115 BAS316,135", Standard Lead Time="4 Weeks", Supplier 1=Digi-Key, Vf="1.25V @ 150mA"
X1 X2: library part CI3120P1V00, "WH Series 2.54mm Wire to Board Straight DIP Type Headers, 20 Pin", Manufacturer=CviLux, Temperature range="-25℃ ~ 85℃", Ajax_1C_PN=NONE, Ajax_1С_Status="RND Only", Component Type=PTH, ComponentLink1Description=Datasheet, ComponentLink1URL=https://www.cvilux.com/uploads/drawings/100/723/CI3102S.pdf, Part Number=CI3120P1V00, Part Type="Wire-to-Board / Header", Price=NONE, Replacement=NONE

## Free pads (board coordinates)
  round 4 hole 2: 2(46.694,45.647) 3(46.8,30.28) 4(46.8,15.04)

## Via types
v1: diameter 2, hole 0.8, Top Layer to Bottom Layer, 41 vias

## Nets (pads, with @x,y where several pads share a name; then routed paths per layer and width w, separated by ;. In a path a pad name is that pad's centre, name@x,y a point inside that pad or via, vN(x,y) a via of type N, cw(c..) or ccw(c..) an arc to the next point about the centre after c; other vN are vias at no path point)
+3V3: C13.1 C19.1 C34.1 C35.1 DA2.2 DA2.4 LED1.2 LED2.2 X1.18 X2.1 | length 83.3
  Top Layer w1: DA2.2 16.6,77.575 16.69,77.665 16.69,79.68 C19.1 16.71,80.717 19.593,83.6 C13.1 ; X2.1 25.89,88.38 C35.1 C13.1 ; LED2.2 35.75,80.9 ; LED1.2 47.65,80.9 ; X1.18 68.55,76.085 68.89,76.425 68.89,80.021 68.011,80.9 47.65,80.9 ; C13.1 25.89,82.61 27.6,80.9 35.75,80.9 ; 35.75,80.9 47.65,80.9
+5V: C15.1 C16.1 C17.1 C18.1 C38.2 DA1.2 DA1.4 DA2.3 DA5.5 IC6.6 | length 74
  Top Layer w0.5: DA5.5 50.45,57.75 51.7,56.5 53.457,56.5 54.604,57.647 IC6.6@55.407,57.647
  Top Layer w0.7: DA1.2 DA1.4 ; C38.2 48.06,57.75 DA5.5 ; IC6.6@55.407,57.647 IC6.6
  Top Layer w1: DA1.4@7.32,77.62 7.32,77.477 7.997,76.8 C16.1 C15.1 10.74,74.45 10.79,74.4 C17.1 C18.1 10.79,68.31 12.9,66.2 41,66.2 48,59.2 C38.2 ; 18.9,66.575 DA2.3
+5V_ISO: B2.14 C21.1 C27.1 C37.1 DA3.2 DA3.4 DA4.5 IC6.3 R41.1 R47.1 | length 178.3
  Top Layer w0.7: IC6.3 62.121,57.73 61.771,57.38 61.675,57.38 61.06,56.765 61.06,53.115 61.675,52.5 68.424,52.5 ; DA4.5@68.34,56.24 68.34,54.15 C37.1 ; C37.1@68.424,54.066 68.424,52.5 ; DA3.2 DA3.4 DA3.4@77.45,54.7 ; R41.1 116.65,77.3 116.65,74.3 R47.1 ; B2.14 123.3,33.01 C27.1 123.53,32.98 127.82,32.98 v1(128,32.8) ; v1@137.6,31.7 140,34.1 140,60.8 126.55,74.25 R47.1 ; 68.424,52.5 72.14,52.5 72.8,53.16 C21.1 74.566,54.19 75.076,54.7 DA3.4@77.45,54.7 ; DA3.4@77.45,54.7 73.7,58.45 73.7,66.5 79.2,72 95.8,72 100.5,67.3 105.7,67.3 112.65,74.25 R47.1
  Bottom Layer w2: v1(128,32.8) 137,32.8 v1(137.8,32)
+12V_ISO: B4.3 C29.1 C30.1 C31.1 C33.1 D15.2 D16.2 D18.2 D19.2 DA3.3 | length 187.7
  Top Layer w0.7: DA3.3 75.7,66.6 77.81,68.71 C30.1 81.29,68.8 83.386,68.8 83.546,68.64 B4.3 86.61,68.89 87.6,67.9 C33.1 90.1,69.24 90.96,70.1 C29.1 ; D16.2 D15.2@112.7,42.05 ; v1(112.7,44.7) D15.2@112.7,42.05 ; D15.2 D15.2@112.7,42.05 ; D19.2 126.161,22.411 128.136,22.411 128.675,22.95 D18.2 130.1,23.325 132.065,25.29 132.69,25.29 v1(132.9,25.5)
  Bottom Layer w2: C33.1 93.6,64.4 102.7,64.4 108.2,69.9 108.2,78.043 109.957,79.8 118.7,79.8 132.8,65.7 132.8,52.1 ; v1(112.7,44.7) 121.4,44.7 128.8,52.1 132.8,52.1 ; v1(132.9,25.5) 139,25.5 147.6,34.1 147.6,51.221 146.721,52.1 140.7,52.1 132.8,52.1
  other v1: 87.4,68.1
AC12V: D8.2 U1.9 | length 3.2
  Top Layer w0.7: U1.9 77.34,48 D8.2
BAT_+: C2.2 C3.2 D7.2 IC2.4 pad.3 Q1.2 Q4.2 R7.2 R9.2 R10.2 R11.2 U1.4 U1.5 VD1.AN | length 96.5
  Top Layer w1: v1(11.7,28.8) 5.562,28.8 2.2,32.162 2.2,59.2 4.141,61.141 15.159,61.141 15.5,60.8 ; VD1.AN 17.425,63.066 15.5,61.141 D7.2 19.506,57.15 20.116,56.54 Q4.2 ; C2.2 24.257,28.693 23.8,29.15 v1(23.8,32.3) 25.6,32.3 28.8,35.5 30.433,35.5 31.44,36.507 Q1.2
  Bottom Layer w2: v1(11.7,28.8) 20.3,28.8 v1(23.8,32.3)
GND: B1.2 B3.2 C2.1 C3.1 C5.1 C6.1 C7.1 C8.1 C13.2 C14.2 C15.2 C16.2 C17.2 C18.2 C19.2 C20.2 C34.2 C35.2 C38.1 DA1.1 DA2.1 DA5.2 IC1.7 IC2.2 J3.3 Q2.3 Q3.2 Q5.3 Q6.2 Q7.3 R2.1 R3.1 R5.1 R6.1 R20.1 R21.1 R22.1 R23.1 R25.3 R58.1 X1.19 X1.20 X2.2 | length 139.4
  Top Layer w0.5: IC2.2 17.85,30.149 18.436,30.149 18.95,30.663 18.95,31.55 18.19,32.31 ; v1(45.9,56.1) 45.945,56.145 47.955,56.145 48.074,56.264 50.208,56.264 50.875,55.597 50.875,55.075 DA5.2 50.9,54.3 50.45,53.85 R58.1
  Top Layer w0.7: R25.3 5.51,53.665 6.35,52.825 R20.1 ; R22.1 8,32.425 8.725,31.7 14.1,31.7 v1(15.9,33.5) 16.252,33.5 16.752,34 C8.1 18.19,32.31 ; C18.2 14.027,70.2 DA2.1@14.3,70.473 ; C17.2@12.41,72.055 C17.2 ; C17.2@12.41,72.312 C15.2 C16.2 12.305,76.905 12.305,79.595 v1(12.2,79.7) C19.2 ; v1(14.3,68.4) DA2.1@14.3,70.473 ; DA2.1@14.3,71.436 DA2.1 DA2.1@14.3,70.473 ; R23.1 16.284,50.414 16.604,50.094 C7.1 16.624,49.384 19.17,49.384 R21.1 21.069,49.404 C6.1@21.428,49.763 ; IC1.7 21.5,46.371 21.5,48.001 C5.1 C6.1@21.428,49.763 ; C6.1 C6.1@21.428,49.763 ; C3.1 24.11,17.934 24.01,18.034 C2.1 ; Q6.2 24.603,56.445 26.905,56.445 R6.1 ; X2.2 27.91,88.535 27.51,88.135 C35.2 C13.2 27.61,83.7 v1(29.2,83.7) ; v1(29.1,1.9) 29.175,1.825 31.625,1.825 R2.1 ; v1(31.4,49.3) 31.325,49.225 31.325,46.875 R3.1 31.33,46.72 31.33,43.58 Q3.2 ; R5.1 34.65,53.725 35.92,54.995 Q5.3 ; J3.3 v1(80.1,90.8) ; v1(102.2,78.4) 102.285,78.315 104.665,78.315 B1.2 ; v1(102.4,69.7) 104.72,69.7 B3.2
  Top Layer w1: DA1.1 v1(4.3,68.3) 4.3,66 C20.2 ; v1@4.5,67.5 C14.2 ; C34.2 70.51,76.385 71.09,75.805 X1.19
  Bottom Layer w2: J3.3 92.32,88.28 v1(102.2,78.4) 102.4,78.2 v1(102.4,69.7)
HGND: B1.3 B2.7 B3.3 B4.2 C1.1 C9.1 C10.1 C11.2 C21.2 C22.2 C27.2 C28.2 C29.2 C30.2 C31.2 C33.2 C37.2 C40.2 D2.2 D6.2 D9.2 D14.2 D17.2 D20.2 DA3.1 DA4.2 IC4.4 IC5.4 Q8.3 Q11.3 R12.1 R29.1 R40.1 R53.1 R54.1 R55.1 | length 450.6
  Top Layer w0.5: DA4.2 67.415,59.065 67.415,58.543 67.958,58
  Top Layer w0.7: C40.2 64.63,67.38 64.63,65.52 R55.1 64.85,65.3 66.8,65.3 v1(66.9,65.2) 66.9,64.956 67.35,64.506 R53.1 ; 67.958,58 R54.1 ; R54.1@69.95,57.89 70.027,57.813 70.027,56.925 70.5,56.452 v1(70.5,56.1) ; C37.2 70.01,54.44 70.005,54.445 70.005,55.253 70.5,55.748 v1(70.5,56.1) ; R12.1 72.75,44.95 73.54,44.95 73.79,45.2 92.9,45.2 ; C21.2 72.67,55.94 70.66,55.94 v1(70.5,56.1) ; DA3.1 80.3,63.7 v1(79.8,64.2) 79.3,64.7 C31.2 C30.2 82.896,67.09 B4.2 85.61,66.19 87.59,64.21 C22.2 90.484,64.21 C28.2 95.214,64.23 ; v1(113.8,67.4) v1@113.8,68.255 ; v1(113.8,76.1) 113.8,78.18 B1.3 ; IC5.4 v1@114.595,23.8 ; v1(114.6,23.7) 114.6,25.24 114.75,25.39 B2.7 ; C27.2 123.595,31.295 125.005,31.295 v1@125.2,31.1 ; R29.1 123.401,51.049 123.251,51.199 122.551,51.199 121.1,52.65 121.1,53.35 120.95,53.5 D9.2 121.05,53.8 121.05,56.05 122.5,57.5 Q8.3 ; IC4.4 125.905,36.503 125.93,36.528 128.128,36.528 v1(128.3,36.7) 130.65,36.7 D17.2 ; Q11.3 129.28,4.25 130.425,5.395 130.425,6.95 131,6.95 131.9,7.85 131.9,13.35 D20.2 ; R40.1 129.95,9.675 130.525,9.1 130.525,7.55 130.975,7.1 D14.2@131.25,7.1
  Top Layer w1: C29.2 94,70.1 95.1,69 C33.2 95.1,65.755 ; 95.1,64.23 95.1,65.755 ; C11.2 95.2,64.23 ; v1(113.8,67.4) 113.825,67.425 113.825,68.255 113.825,69.705 B3.3 111.23,69.73 107.255,65.755 95.1,65.755
  Top Layer w1.5: D2.2 84.75,20.45 92.9,12.3 C1.1 ; D6.2 83,41.75 83.05,41.7 92.9,41.7 ; C10.1 92.9,41.7 ; C11.2 92.95,55.25 92.95,52.1 92.9,52.05 92.9,45.2 C9.1 92.9,41.7
  Bottom Layer w2: v1(66.9,65.2) 78.8,65.2 v1(79.8,64.2) 80.1,63.9 80.1,60.1 ; v1(70.5,56.1) 76.1,56.1 80.1,60.1 ; C1.1 92.9,12.8 ; v1(113.8,76.1) v1(113.8,67.4) 114.8,66.4 119.7,66.4 124.154,61.946 124.154,59.31 124.181,59.283 124.181,57.452 Q8.3@124.154,57.425 ; Q8.3@124.154,57.454 120.2,53.5 93.1,53.5 ; v1@125.3,31.1 123.35,29.15 123.35,23.95 ; v1(125.5,31.1) 125.5,33.9 v1(128.3,36.7) ; 129.275,5.321 129.275,6.725 123.2,12.8 92.9,12.8 ; v1(131.9,10.8) 131.9,15.4 123.35,23.95 ; 80.1,60.1 92.6,60.1 C11.2 93.1,55.4 93.1,53.5 ; 92.9,12.8 92.9,22.5 ; 92.9,22.5 C10.1 C9.1 92.9,45.454 93.1,45.654 93.1,53.5 ; 92.9,22.5 113.4,22.5 v1(114.6,23.7) 123.1,23.7 123.35,23.95
I_sens: IC1.16 R24.1 X1.8 | length 87.8
  Top Layer w0.7: R24.1 5.4,35.261 5.439,35.3 5.439,36.361 5.428,36.372 IC1.16
  Top Layer w0.8: v1(22.8,78.8) 41.2,78.8 43.15,76.85 X1.8
  Bottom Layer w0.8: X1.8@43.15,73.689 X1.8
  Bottom Layer w2: IC1.16 1.7,41.327 1.7,70.3 5.5,74.1 21.436,74.1 22.9,75.564 22.9,78.7 v1(22.8,78.8)
I_SET: IC1.15 R17.1 R22.2 | length 8.4
  Top Layer w0.7: IC1.15 7.984,37.583 7.984,35.066 8.05,35 9.9,35 11.85,33.05 R17.1
NetB1_1: B1.1 R44.2 | length 2.8
  Top Layer w1: R44.2 102.05,80.835 104.685,80.835 B1.1
NetB1_4: B1.4 B2.1 B2.2 R41.2 | length 96.7
  Top Layer w0.7: B1.4 115.93,80.77 116.6,80.1 R41.2 125.15,79.25 141.5,62.9 141.5,43.926 142.2,43.226 v1(142.2,43) ; B2.2 112.86,31.74 v1(112.1,32.5) 112.398,32.5 112.908,33.01 B2.1
  Bottom Layer w2: v1(112.1,32.5) 120.564,32.5 131.064,43 v1(142.2,43)
NetB2_3: B2.3 B2.4 B2.5 B2.13 IC4.2 | length 23.8
  Top Layer w0.7: B2.5 113.239,27.93 112.8,28.369 112.8,29.2 ; B2.4 112.8,29.2 ; B2.13 120.485,31.7 118.057,31.7 ; IC4.2 123.365,35.176 122.663,34.473 118.973,34.473 118.057,33.557 118.057,31.7 ; 112.8,29.2 112.8,30.031 113.239,30.47 116.827,30.47 118.057,31.7
NetB2_6: B2.6 B2.10 IC5.2 | length 11
  Top Layer w0.7: B2.6 117.135,26.66 ; IC5.2 117.135,26.76 118.305,27.93 B2.10
NetB2_8: B2.8 IC5.3 | length 17.4
  Top Layer w0.7: IC5.3 115.89,21.687 115.89,20.667 115.96,20.597 116.458,20.1 119.082,20.1 ; 119.083,20.1 123.2,20.1 124,20.9 124,24.951 123.561,25.39 B2.8
NetB2_9: B2.9 B2.12 B3.4 R47.2 | length 89.4
  Top Layer w0.7: B3.4 113.89,72.31 116.66,72.31 R47.2 124.95,72.35 138.4,58.9 138.4,37.4 133.5,32.5 v1(133.5,29.8) 130.36,26.66 B2.9 ; B2.12 122.043,30.47 123.413,29.1 127.148,29.1 127.848,29.8 v1(128.2,29.8)
  Bottom Layer w2: v1(128.2,29.8) v1(133.5,29.8)
NetB2_11: B2.11 IC4.3 | length 23.2
  Top Layer w0.7: B2.11 121.616,29.2 122.916,27.9 129.185,27.9 130.7,29.415 130.7,33.016 128.966,34.75 127.434,34.75 127.184,34.5 125.311,34.5 124.635,35.176 IC4.3
NetB3_1: B3.1 R48.2 | length 2.6
  Top Layer w1: R48.2 102.175,72.275 102.25,72.275 103.195,72.275 103.2,72.27 B3.1
NetB4_1: B4.1 C11.1 C22.1 C28.1 D8.1 | length 23.8
  Top Layer w0.7: B4.1 84.536,62.75 84.815,62.75 84.975,62.59 C22.1 ; D8.1 84.75,52.05 C11.1 90.2,62.306 C28.1@90.339,62.445 ; C22.1@88.605,62.595 88.61,62.6 90.184,62.6 90.189,62.595 90.205,62.61 C28.1
NetC1_2: C1.2 C9.2 C10.2 D3.1 D4.1 Q9.2 Q10.2 R8.2 | length 156.8
  Top Layer w0.7: R8.2 72.65,39.35 72.9,39.1 72.9,27.4 75.2,25.1 84.7,25.1 91.1,18.7 100.4,18.7
  Top Layer w1.5: D3.1 83,6.618 84.318,5.3 99.082,5.3 ; D4.1 83,29.875 83.05,29.825 84.375,29.825 90.7,23.5 100.4,23.5 ; Q10.2 110.785,3.708 110.785,2.253 109.791,1.259 103.123,1.259 99.082,5.3 ; Q9.2 110.988,57.412 110.988,54.488 108.2,51.7 104.4,51.7 100.4,47.7 C9.2 C10.2 100.4,23.5 ; 99.082,5.3 100.4,6.618 C1.2 100.4,18.7 100.4,23.5
NetC4_1: C4.1 R23.2 | length 2.5
  Top Layer w0.7: C4.1 14.342,49.452 14.342,51.814 R23.2
NetC4_2: C4.2 IC1.4 R16.1 | length 4.7
  Top Layer w0.7: R16.1 12.125,47.511 12.125,46.525 13.048,45.602 IC1.4 ; R16.1@12.125,47.697 14.207,47.697 C4.2
NetC7_2: C7.2 IC1.5 | length 2.6
  Top Layer w0.7: IC1.5 15.588,45.709 16.393,46.514 16.393,47.533 C7.2
NetC12_1: C12.1 C24.2 D9.1 D17.1 IC4.6 L2.1 Q8.2 Q9.3 R36.1 | length 78.8
  Top Layer w0.7: R36.1 117.9,61.5 118,61.6 ; C24.2 118.377,38.877 119.042,38.877 119.255,39.09 C12.1 120.41,39.2 124.635,39.2 ; IC4.6 124.635,40.2 124.635,39.2 ; L2.1 135.894,47.894 135.594,47.894 131.1,43.4 D17.1 128.7,40.55 127.35,39.2 124.635,39.2
  Top Layer w1: Q8.2@126.631,57.391 Q8.2
  Top Layer w1.5: Q9.3 108.469,57.609 108.469,60.248 109.821,61.6 118,61.6 126.74,61.6 ; D9.1 125.625,53.8 126.631,54.806 Q8.2@126.631,57.391 ; Q8.2 126.74,61.6 ; L2.1 136.2,56.2 130.8,61.6 126.74,61.6
NetC12_2: C12.2 C24.1 D15.1 IC4.8 | length 11.3
  Top Layer w0.7: D15.1 113.75,37.65 116.8,40.7 118.2,40.7 C24.1 118.345,40.755 120.255,40.755 C12.2 120.452,40.862 121.245,40.862 121.582,41.2 122.02,41.2 122.095,41.275 IC4.8
NetC14_1: C14.1 C20.1 DA1.3 VD1.CA | length 12.2
  Top Layer w1: DA1.3 8.9,67.785 9.01,67.675 9.01,65.19 9.9,64.3 14.975,64.3 VD1.CA
NetC23_1: C23.1 C25.1 C26.2 D14.1 D20.1 IC5.6 L1.2 Q10.3 Q11.2 R37.1 | length 112.2
  Top Layer w0.7: R37.1 114.85,8.65 113,10.5 113,17.685 113.615,18.3 114.863,18.3 115.263,17.9 115.272,17.9 115.865,17.308 IC5.6 115.865,15.189 116.554,14.5 119.696,14.5 120.256,15.06 120.256,15.56 120.486,15.79 C25.1 120.83,16.02 121.424,16.02 121.504,16.1 C26.2 123.6,15 125.1,13.5 D20.1 127.45,14.55 128.4,15.5 134.07,15.5 137.659,11.91 ; Q11.2 126.74,6.99 D14.1
  Top Layer w1.5: Q10.3 113.44,3.6 115.94,1.1 126.849,1.1 ; Q11.2 126.849,3.791 126.849,1.1 ; 137.659,11.91 135.55,9.801 135.55,6.539 130.111,1.1 126.849,1.1
  Top Layer w2: 137.659,11.91 144.31,11.91 148.9,16.5 L1.2 149.15,19.55 149.15,22.95 C23.1
NetC23_2: C23.2 L1.1 L2.2 | length 61
  Top Layer w2: L1.1 138.9,25 155.5,41.6 155.5,54 C23.2 150.12,56.8 143.82,50.5 L2.2
NetC25_2: C25.2 C26.1 D18.1 IC5.8 | length 13.6
  Top Layer w0.7: 119.025,17.346 118.405,16.726 118.655,16.976 118.655,17.04 119.025,17.41 120.815,17.41 121.505,18.1 C26.1 124.4,18.9 129.85,18.9 D18.1
NetC39_1: C39.1 DA4.1 IC6.2 | length 8.1
  Top Layer w0.7: IC6.2 65.677,60.27 65.777,60.17 68.365,60.17 DA4.1@68.365,59.09 ; 68.398,60.17 69.92,60.17 C39.1
NetC39_2: C39.2 DA4.4 IC6.4 R54.2 | length 18.5
  Top Layer w0.7: IC6.4 63.155,55.145 65.155,55.145 v1(65.2,55.1) ; v1@65.235,55.135 65.26,55.135 66.44,56.315 DA4.4 ; v1(71.7,61.9) 71.705,61.895 71.705,60.005 71.78,59.93 71.78,58.07 R54.2
  Bottom Layer w2: v1(65.2,55.1) 67,56.9 67,59.186 69.714,61.9 v1(71.7,61.9)
NetC40_1: C40.1 DA4.3 R51.2 R55.2 | length 15.6
  Top Layer w0.5: R55.2 62.65,65.4 62.55,65.5 61.25,65.5 61.25,65.175 61,64.925 60.939,64.925 60.5,64.486 60.5,60.5 61.16,59.84 61.16,59.794 61.864,59.09 DA4.3 ; R55.2@62.85,65.5 62.87,65.52 62.87,67.48 C40.1
NetD1_1: D1.1 Q1.3 Q3.1 R1.1 | length 39.5
  Top Layer w0.7: R1.1 32.9,10.25 34.525,10.25 34.625,10.35 35.3,10.35 ; Q3.1 33.8,43.4 33.8,38.38 Q1.3 33.99,38.19 33.99,35.51 v1(34,35.5) ; v1(34.2,24.3) 35.3,23.2 35.3,10.35 ; D1.1 35.3,10.35
  Bottom Layer w2: Q1.3 33.99,38.19 33.99,35.51 v1(34,35.5) 34.1,35.4 34.1,24.4 v1(34.2,24.3)
NetD1_2: D1.2 Q2.1 R1.2 R2.2 | length 10.8
  Top Layer w0.7: R2.2 31.774,3.724 Q2.1@35.776,3.724 ; R1.2 33,7.25 35.575,7.25 35.7,7.125 D1.2 ; D1.2@35.475,6.825 35.776,6.524 Q2.1@35.776,3.724 ; Q2.1 Q2.1@35.776,3.724
NetD2_1: D2.1 D3.2 U1.16 | length 9.3
  Top Layer w1.5: U1.16 82.85,12.5 D3.2 D2.1
NetD4_2: D4.2 D6.1 U1.11 | length 9.1
  Top Layer w1.5: U1.11 77.355,37.825 D6.1@82.95,37.825 ; D4.2 83,37.325 82.95,37.375 D6.1@82.95,37.825 ; D6.1 83,37.775 D6.1@82.95,37.825
NetD5_1: D5.1 Q4.3 Q6.1 R4.1 | length 11.2
  Top Layer w0.7: Q4.3 23.166,59.08 23.266,59.18 Q6.1@24.158,59.18 ; Q6.1 26.733,58.83 27.803,59.9 R4.1 ; R4.1@28.7,59.35 28.7,56.825 28.825,56.7 D5.1
NetD5_2: D5.2 Q5.1 R4.2 R5.2 | length 18
  Top Layer w0.7: R4.2 R4.2@31.788,59.863 ; D5.2 32.15,58.585 31.925,58.81 31.925,59.725 R4.2@31.788,59.863 ; D5.2@32.375,56.7 32.5,56.575 32.5,53.75 R5.2 ; Q5.1 41,59.25 40.35,59.9 31.825,59.9 R4.2@31.788,59.863
NetD10_1: D10.1 IC4.5 R28.1 | length 11.5
  Top Layer w0.7: IC4.5 125.905,44.43 128.1,46.625 128.1,48.975 128.125,49 128.5,49 129.2,49.7 R28.1
NetD10_2: D10.2 R27.1 | length 2.7
  Top Layer w0.7: D10.2 131.55,51.6 R27.1
NetD11_1: D11.1 IC4.7 R34.1 | length 10.1
  Top Layer w0.7: R34.1 118.4,47 118.85,46.55 D11.1 121.7,45.3 123.365,43.635 IC4.7
NetD11_2: D11.2 R32.1 | length 2.7
  Top Layer w0.7: R32.1 115.55,47.8 D11.2
NetD12_1: D12.1 IC5.7 R35.1 | length 20
  Top Layer w0.7: R35.1 107.775,9.5 107.5,9.775 107.7,9.775 D12.1 107.7,15.2 111.9,19.4 112.342,19.4 112.442,19.5 115.36,19.5 115.961,18.9 116.515,18.9 117.132,18.282 IC5.7
NetD12_2: D12.2 R33.1 | length 3
  Top Layer w0.7: R33.1 111.025,9.525 111.025,12.125 D12.2
NetD13_1: D13.1 IC5.5 R39.1 | length 12.3
  Top Layer w0.7: IC5.5 114.595,13.405 115.8,12.2 120.6,12.2 120.6,9.675 R39.1
NetD13_2: D13.2 R38.1 | length 3
  Top Layer w0.7: R38.1 123.475,9.625 123.475,12.175 123.5,12.2 D13.2
NetD16_1: D16.1 IC4.1 | length 15.1
  Top Layer w0.7: D16.1 109.475,37.475 109.475,36.225 110.4,35.3 115.741,35.3 116.729,36.288 IC4.1
NetD19_1: D19.1 IC5.1 | length 3.8
  Top Layer w0.7: IC5.1 120.887,21.712 120.925,21.75 120.925,21.85 121.475,22.4 D19.1
NetDA5_1: DA5.1 DA5.4 R52.1 | length 26.8
  Top Layer w0.5: DA5.1 49.1,55.05 49.1,52.151 49.751,51.5 55.2,51.5 57.8,54.1 57.8,58.661 57.361,59.1 54,59.1 53.4,59.7 R52.1 51.825,59.625 51.825,57.775 DA5.4
NetDA5_3: DA5.3 IC6.5 R58.2 | length 6
  Top Layer w0.7: DA5.3 51.85,53.605 52.35,53.105 R58.2 ; DA5.3@51.87,55.07 52.823,55.07 52.943,55.19 IC6.5
NetF1_1: F1.1 L1.4 | length 20.9
  Top Layer w2: L1.4 143.9,1.3 154.47,1.3 156.545,3.375 F1.1
NetF1_2: F1.2 J1.1 | length 17.2
  Top Layer w2: J1.1 160.643,17.8 163.4,15.043 163.4,5.97 161.455,4.025 F1.2
NetIC1_3: IC1.3 R19.2 | length 2.8
  Top Layer w0.7: R19.2 10.05,46.167 10.508,45.709 IC1.3
NetIC1_6: IC1.6 R21.2 | length 2.5
  Top Layer w0.7: IC1.6 18.35,45.761 18.35,46.889 18.965,47.504 R21.2
NetIC1_9: IC1.9 Q4.1 Q6.3 R6.2 | length 24.5
  Top Layer w0.7: Q4.1 20.75,54.25 Q6.3 ; IC1.9 25.3,39.691 25.3,48.9 24.523,49.677 24.523,54.235 Q6.3 ; R6.2 26.9,54.35 24.608,54.35 Q6.3
NetIC1_10: IC1.10 Q1.1 Q3.3 R3.2 | length 19.5
  Top Layer w0.7: IC1.10 20.917,37.35 20.917,36.383 22.1,35.2 25.9,35.2 Q1.1 ; Q1.1@29.12,38.42 Q3.3 29.235,43.615 29.235,46.685 R3.2
NetIC2_1: IC2.1 R24.2 | length 14.5
  Top Layer w0.5: 17.022,30.999 17.072,31.049 IC2.1
  Top Layer w0.7: R24.2 5.4,31.8 6.7,30.5 16.523,30.5 17.022,30.999
NetIC2_3: IC2.3 J2.2 R7.1 R9.1 R10.1 R11.1 R13.2 | length 31
  Top Layer w0.7: R7.1 R9.1 R10.1 R11.1 IC2.3@17.6,29.049